# Altium PCB PCB_Minitek127-20pin.PcbDoc
Units mm, origin at the board's own origin, x right, y up, seen from the top; angles counter-clockwise.
Board outline 37 x 15.2 mm, 2 copper layers (Top Layer, Bottom Layer); 3 components, 18 nets, 44 pads, 35 vias.
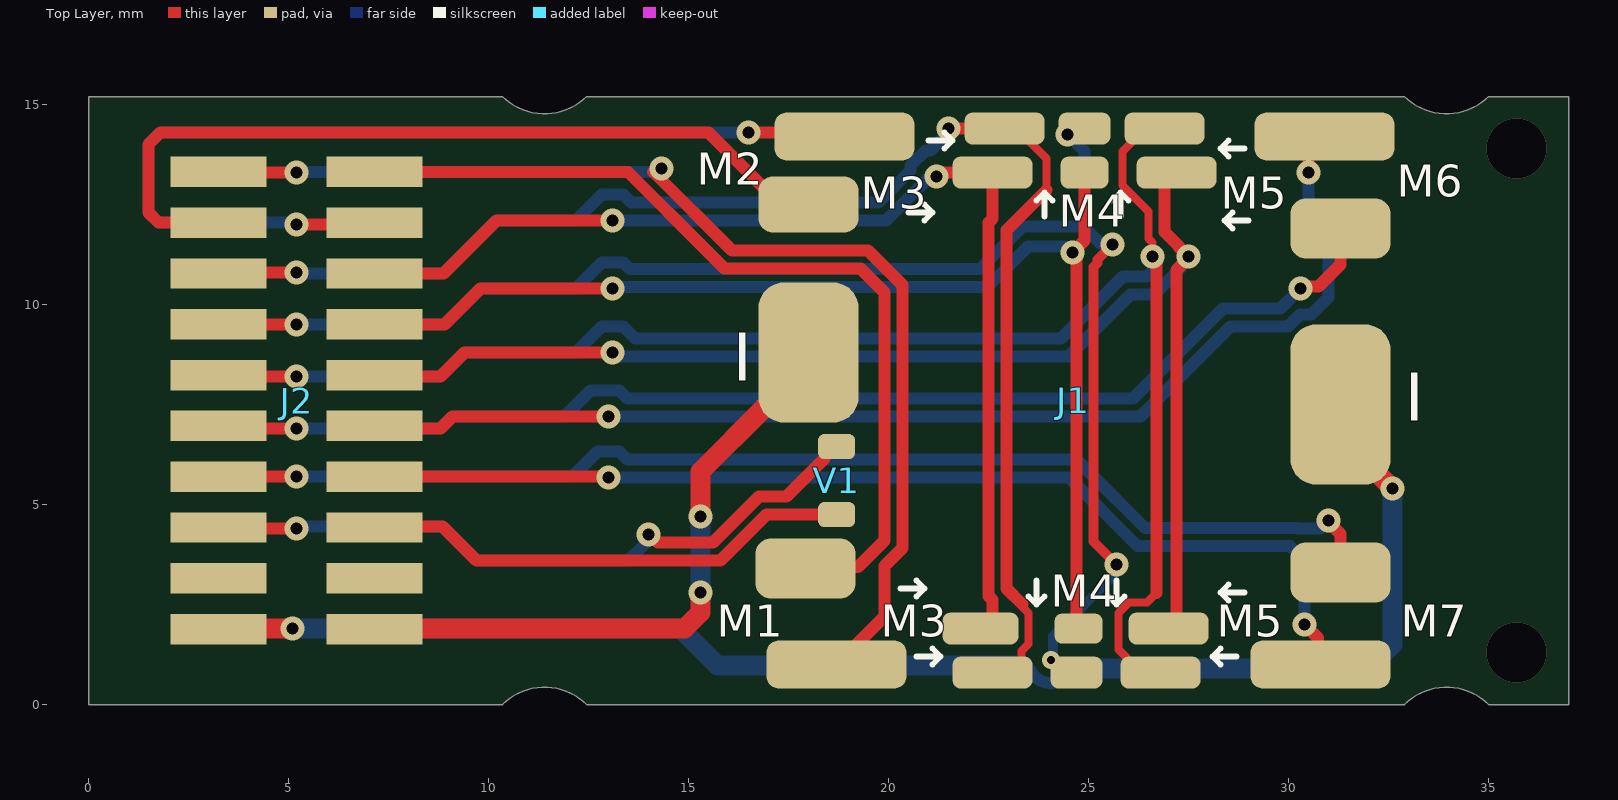
[diagram p0: Top Layer view]
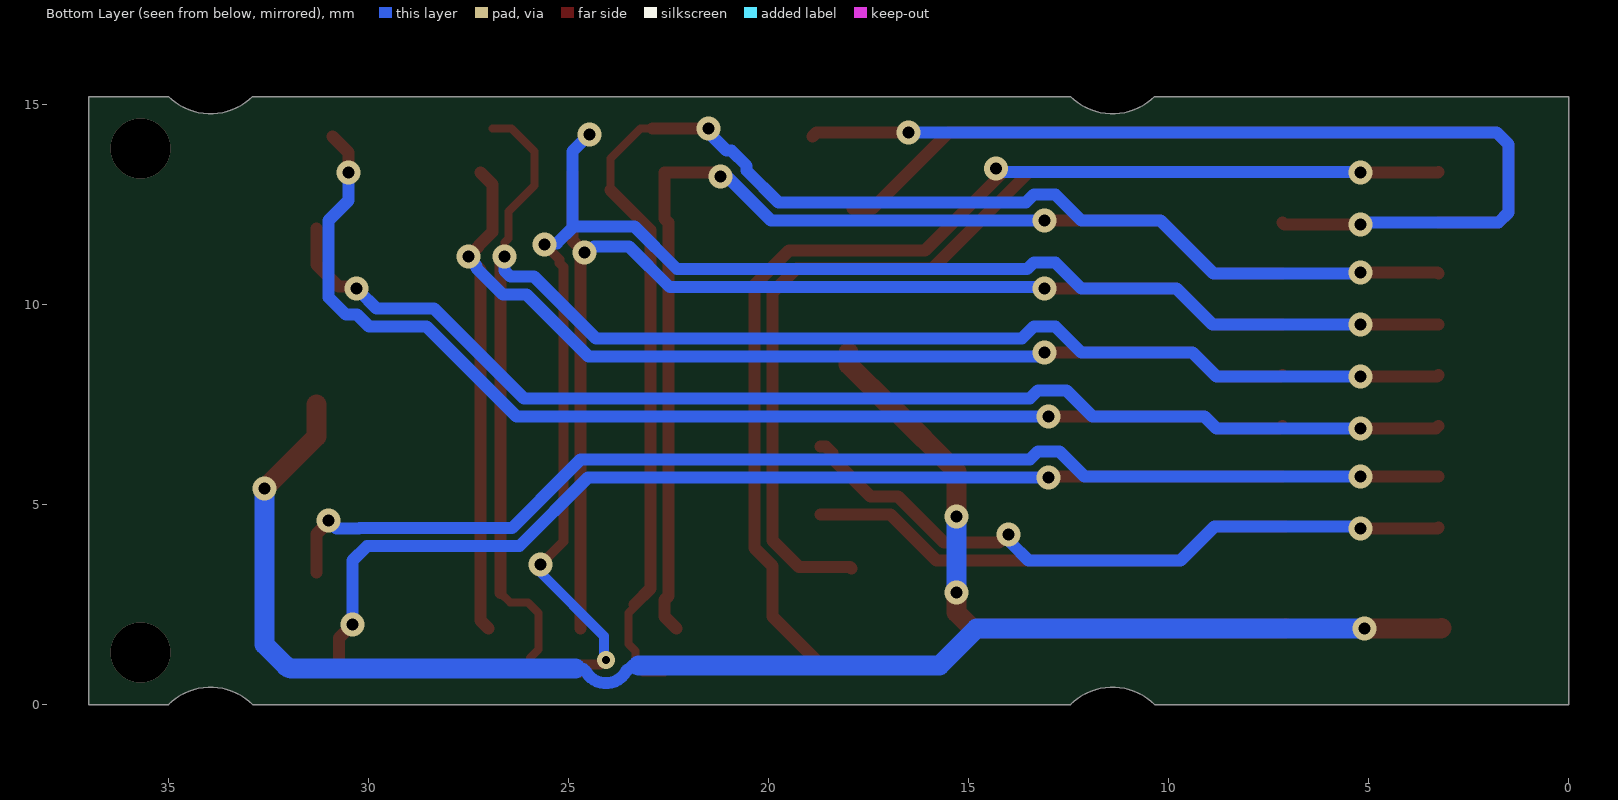
[diagram p1: Bottom Layer view, seen from below]

## Layer stack, top to bottom
Top Solder: solder mask 0.01, Solder Resist, Dk 3.5
Top Layer: signal copper 0.036
Dielectric 1: dielectric 0.32, FR-4, Dk 4.8
Bottom Layer: signal copper 0.036
Bottom Solder: solder mask 0.01, Solder Resist, Dk 3.5

## Board outline
0,0 0,15.2 10.35,15.2 ccw(c11.4,16.25) 12.45,15.2 32.9,15.2 ccw(c33.95,16.25) 35,15.2 37,15.2 37,0 35,0 ccw(c33.95,-1.05) 32.9,0 12.45,0 ccw(c11.4,-1.05) 10.35,0

## Design rules (kind name [scope] priority, off if disabled: settings)
Clearance [All] p1: gap=0.25 ignorepadtopadclearanceinfootprint=FALSE except(0: Arc-Hole Track-Hole SMDPad-Hole THPad-Hole Via-Hole Fill-Hole Poly-Hole Region-Hole Text-Hole; 0.15: Arc-Arc Arc-Track Arc-SMDPad Track-Track Track-SMDPad; 0.2: Arc-Via Track-Via SMDPad-SMDPad; 0.5: THPad-THPad)
HoleSize [All] p1: absolutevalues=TRUE maxlimit=6.3 minlimit=0.2 maxpercent=80.000 minpercent=20.000
MinimumAnnularRing [All] p1: minimumring=0.13
MinimumSolderMaskSliver [All] p1 off: minsoldermaskwidth=0.254
PolygonConnect [All] p1: connectstyle=Relief reliefconductorwidth=0.254 reliefentries=4 polygonreliefangle="90 Angle" airgapwidth=0.254
RoutingVias [All] p1: holewidth=0.3 width=0.6 viastyle="Through Hole" minholewidth=0.2 minwidth=0.45 maxholewidth=6.3 maxwidth=6.7
SilkToSilkClearance [All] p1: silktosilkclearance=0.15
SilkToSolderMaskClearance [IsPad] p1: minsilkscreentomaskgap=0.15 clearancetoexposedcopper=TRUE
SolderMaskExpansion [All] p1: expansion=0.102 istentingtop=FALSE useseparateexpansions=TRUE expansionbottom=0.102 istentingbottom=TRUE
Width [All] p1: maxlimit=0.5 minlimit=0.15 preferedwidth=0.3 minimp=50.000000 maximp=50.000000 favimp=50.000000
26 further rules are at their usual default settings.

## Classes and differential pairs
net class [1..16]: 1 2 3 4 5 6 7 8 9 10 11 12 13 14 15 16

## Components (designator, comment, footprint, x,y, rotation, side; value= is the part's Value field where it differs from the comment)
J1 "sample_contact_place" sample 24.6,7.6 r0 top
J2 "20021221-00020C4LF" 2002122100020C4LF 5.2,7.6 r90 top
V1 "Varicap" DIOC160X80X70L20N 18.7,5.6 r90 top

## Footprints (in the part's own frame and the unit in brackets; to place one, negate y for a bottom-side part, rotate by r counter-clockwise, add the part's x,y. Pads: shape width x height; smd on the part's side, far side on the other; paste and mask are expansions set on the pad)
2002122100020C4LF [mm]
  rect 0.76x2.4 smd: 1(5.715,1.95) 2(5.715,-1.95) 3(4.445,1.95) 4(4.445,-1.95) 5(3.175,1.95) 6(3.175,-1.95) 7(1.905,1.95) 8(1.905,-1.95) 9(0.635,1.95) 10(0.635,-1.95) 11(-0.635,1.95) 12(-0.635,-1.95) 13(-1.905,1.95) 14(-1.905,-1.95) 15(-3.175,1.95) 16(-3.175,-1.95) 17(-4.445,1.95) 18(-4.445,-1.95) 19(-5.715,1.95) 20(-5.715,-1.95)
  body extent -6.58,-3.07 6.58,3.07, height 4.85
DIOC160X80X70L20N [mm] "Diode, Chip; 1.60 mm L X 0.80 mm W X 0.70 mm H body"
  rrect51% 0.63x0.93 smd: A(0.85,0) C(-0.85,0)
  body extent -0.8,-0.4 0.8,0.4, height 0.7
sample [mm]
  rrect50% 3.5x1.2 smd: 1(-5.9,-6.6) 4(-5.7,6.6) 12(6.3,6.6) 14(6.2,-6.6)
  rrect50% 2.5x1.5 smd: 2(-6.675,-4.2) 11(6.7,4.3) 13(6.7,-4.3)
  rrect50% 2.5x1.4 smd: 3(-6.6,4.9)
  rrect50% 2x0.8 smd: 5(-2,-6.8) 5(-1.7,6.8) 6(-2,5.7) 9(2.2,-6.8) 9(2.3,6.8) 10(2.4,-5.7) 10(2.6,5.7)
  rrect50% 1.9x0.8 smd: 6(-2.3,-5.7)
  rrect50% 1.3x0.8 smd: 7(0.1,-6.8) 7(0.3,6.8)
  rrect50% 1.2x0.75 smd: 8(0.15,-5.7)
  rrect50% 1.2x0.8 smd: 8(0.3,5.7)
  rrect50% 2.5x3.5 smd: 15(-6.6,1.2)
  rrect50% 2.5x4 smd: 16(6.7,-0.1)
  silkscreen extent -4.3,-6.6 4.4,6.7, body extent -5,-5 5,5, height 1

## Part data
J2: "Connector", Manufacturer_Name=Amphenol, Datasheet Link=https://cdn.amphenol-icc.com/media/wysiwyg/files/drawing/20021221.pdf, Height=4.75mm, Manufacturer_Part_Number=20021221-00020C4LF

## Via types
v1: diameter 0.6, hole 0.3, Top Layer to Bottom Layer, tented bottom, 32 vias
v2: diameter 1.5, hole 1.5, Top Layer to Bottom Layer, tented bottom, 2 vias
v3: diameter 0.45, hole 0.2, Top Layer to Bottom Layer, tented bottom, 1 vias

## Nets (pads, with @x,y where several pads share a name; then routed paths per layer and width w, separated by ;. In a path a pad name is that pad's centre, name@x,y a point inside that pad or via, vN(x,y) a via of type N, cw(c..) or ccw(c..) an arc to the next point about the centre after c; other vN are vias at no path point)
1: J1.1 J2.1 | length 28.9
  Top Layer w0.3: J2.1 3.265,13.3 v1(5.2,13.3) ; v1(14.319,13.4) 14.2,13.4 14.118,13.318 16.086,11.35 19.486,11.35 20.35,10.486 20.35,3.914 19.9,3.464 19.9,2.2 J1.1
  Bottom Layer w0.3: v1(5.2,13.3) 5.215,13.315 14.234,13.315 v1(14.319,13.4)
2: J1.2 J2.2 | length 22.5
  Top Layer w0.3: J2.2 13.485,13.315 15.5,11.3 15.9,10.9 19.3,10.9 19.9,10.3 19.9,4.1 19.237,3.437 17.962,3.437 J1.2
3: J1.3 J2.3 | length 20.9
  Top Layer w0.3: J2.3 1.755,12.045 1.5,12.3 1.5,14.006 1.794,14.3 15.5,14.3 17.4,12.4 J1.3@17.9,12.4
4: J1.4 J2.4 | length 25.1
  Top Layer w0.3: v1(5.2,12) 7.105,12 J2.4 ; v1(16.5,14.3) 18.8,14.3 J1.4
  Bottom Layer w0.3: v1(5.2,12) 5.155,12.045 1.755,12.045 1.5,12.3 1.5,14.006 1.794,14.3 v1(16.5,14.3)
5: J1.5 J2.5 | length 37
  Top Layer w0.2: J1.5@22.6,0.8 23.134,0.8 23.296,0.962 ccw(c23.225,1.033) 23.325,1.033 23.325,1.339 23.5,1.514 23.5,2.286 23.325,2.461 23.325,2.468 ccw(c23.298,2.505) 23.345,2.505 ; J1.5@22.9,14.4 23.2,14.4 23.95,13.65 23.95,12.861
  Top Layer w0.3: J2.5 3.275,10.8 v1(5.2,10.8) ; v1(21.5,14.4) J1.5@22.9,14.4 ; 23.345,2.505 22.95,2.9 22.95,11.861 23.95,12.861
  Bottom Layer w0.3: v1(5.2,10.8) 5.225,10.775 8.875,10.775 10.2,12.1 12.181,12.1 12.631,12.55 12.831,12.75 13.369,12.75 13.569,12.55 19.75,12.55 20.548,13.348 20.548,13.469 20.928,13.85 21.05,13.85 21.4,14.2 21.4,14.3 v1(21.5,14.4)
6: J1.6 J2.6 | length 28.2
  Top Layer w0.3: J2.6 8.875,10.775 10.2,12.1 v1(13.1,12.1) ; v1(21.198,13.2) 21.298,13.3 22.6,13.3 22.6,12.147 22.5,12.047 22.5,2.714 22.6,2.614 22.6,2.2 J1.6@22.3,1.9
  Bottom Layer w0.3: v1(13.1,12.1) 19.936,12.1 21.036,13.2 21.1,13.136 21.164,13.2 v1(21.198,13.2)
7: J1.7 J2.7 | length 39.2
  Top Layer w0.25: J1.7@24.2,1 24.85,1 J1.7@24.95,0.9 ; J1.7@24.7,0.8 25.05,0.8 J1.7@24.95,0.9 ; J1.7@24.7,0.9 J1.7@24.95,0.9 ; v1(25.6,11.5) 25.225,11.125 25.225,11.041 25.125,10.941 25.125,4.074 v1(25.7,3.499)
  Top Layer w0.3: J2.7 3.255,9.5 v1(5.2,9.5)
  Bottom Layer w0.25: v3(24.066,1.108) 24.105,1.146 24.105,1.274 24.112,1.281 24.112,1.709 25.7,3.297 v1(25.7,3.499)
  Bottom Layer w0.3: v1(5.2,9.5) 8.9,9.5 9.8,10.4 12.181,10.4 12.831,11.05 13.369,11.05 13.537,10.882 22.282,10.882 23.35,11.95 24.869,11.95 25.291,11.528 25.572,11.528 v1(25.6,11.5) ; v1(24.478,14.252) 24.9,13.829 24.9,11.919
8: J1.8 J2.8 | length 29.9
  Top Layer w0.3: J2.8 7.155,9.5 8.9,9.5 9.8,10.4 v1(13.1,10.4) ; J1.8@24.7,1.9 24.7,11.119 24.6,11.219 v1(24.6,11.3) 24.9,11.6 J1.8@24.9,13.3
  Bottom Layer w0.3: v1(13.1,10.4) 13.132,10.432 22.468,10.432 23.486,11.45 24.369,11.45 24.519,11.3 v1(24.6,11.3)
9: J1.9 J2.9 | length 41.1
  Top Layer w0.2: v1(26.6,11.2) 26.6,11.554 26.5,11.654 26.5,12.322 25.85,12.972 25.85,13.828 26.422,14.4 J1.9@26.9,14.4 ; 26.7,2.791 26.459,2.55 26.014,2.55 25.75,2.286 25.75,1.95 25.75,1.372 25.962,1.16 25.962,1.092 26.254,0.8 J1.9@26.8,0.8
  Top Layer w0.3: J2.9 3.285,8.2 v1(5.2,8.2) ; v1(26.6,11.2) 26.7,11.1 26.7,2.791
  Bottom Layer w0.3: v1(5.2,8.2) 8.8,8.2 9.4,8.8 12.181,8.8 12.831,9.45 13.369,9.45 13.669,9.15 23.622,9.15 24.314,9.15 25.864,10.7 26.4,10.7 26.454,10.7 26.6,10.846 v1(26.6,11.2)
10: J1.10 J2.10 | length 33.7
  Top Layer w0.3: J2.10 7.185,8.2 8.8,8.2 9.4,8.8 v1(13.1,8.8) ; J1.10@27,1.9 27.2,2.1 27.2,10.862 v1@27.5,11.162 ; J1.10@27.2,13.3 26.9,13 26.9,11.819 27.25,11.469 27.25,11.45 v1(27.5,11.2)
  Bottom Layer w0.3: v1(13.1,8.8) 13.181,8.8 13.281,8.7 23.436,8.7 24.5,8.7 26.05,10.25 26.64,10.25 27.3,10.91 27.3,10.962 27.5,11.162 v1(27.5,11.2)
11: J1.11 J2.11 | length 30.8
  Top Layer w0.3: J2.11 3.315,6.9 v1(5.2,6.9) ; v1(30.3,10.4) 30.35,10.45 30.75,10.45 31.3,11 J1.11
  Bottom Layer w0.3: v1(5.2,6.9) 8.8,6.9 9.1,7.2 11.9,7.2 12.55,7.85 13.269,7.85 13.469,7.65 26.114,7.65 28.364,9.9 28.5,9.9 29.8,9.9 30.243,10.343 v1(30.3,10.4)
12: J1.12 J2.12 | length 29.8
  Top Layer w0.3: J2.12 7.215,6.9 8.8,6.9 9.1,7.2 v1(13,7.2) ; v1@30.361,13.3 v1(30.5,13.3) 30.5,13.8 J1.12
  Bottom Layer w0.3: v1(13,7.2) 26.3,7.2 28.55,9.45 29.986,9.45 30.286,9.75 30.569,9.75 30.619,9.8 31,10.181 31,12.1 30.5,12.6 v1(30.5,13.3)
13: J1.13 J2.13 | length 30.3
  Top Layer w0.3: J2.13 3.255,5.7 v1(5.2,5.7) ; v1(31,4.6) 31,4.564 31.3,4.264 J1.13
  Bottom Layer w0.3: v1(5.2,5.7) 12,5.7 12.1,5.7 12.725,6.325 13.269,6.325 13.469,6.125 24.7,6.125 25.025,5.8 26.414,4.411 30.225,4.411 30.236,4.4 30.8,4.4 v1(31,4.6)
14: J1.14 J2.14 | length 27
  Top Layer w0.3: J2.14 7.155,5.7 12.975,5.7 v1(13,5.675) ; v1@30.3,2 v1(30.4,2) 30.738,1.662 30.738,1.062 J1.14
  Bottom Layer w0.3: v1(13,5.675) 24.513,5.675 26.227,3.961 30.039,3.961 30.4,3.6 v1(30.4,2)
15: J1.15 J2.20 | length 16
  Top Layer w0.5: J2.20@7.075,1.91 7.085,1.9 14.9,1.9 15.3,2.3 v1(15.3,2.8) ; v1(15.3,4.7) 15.3,5.828 16.892,7.42 16.917,7.42 18,8.503 J1.15
  Bottom Layer w0.5: v1(15.3,2.8) v1(15.3,4.7)
16: J1.16 J2.19 | length 36.9
  Top Layer w0.5: J2.19@3.175,1.91 3.185,1.9 v1(5.1,1.9) ; J1.16 31.3,6.7 v1(32.6,5.4)
  Bottom Layer w0.3: 23.25,0.975 23.396,0.975 23.471,0.9 cw(c23.433,0.755) 23.564,0.828 ccw(c24.066,1.108) 24.566,0.824 cw(c24.697,0.75) 24.698,0.9 24.825,0.9
  Bottom Layer w0.5: v1(5.1,1.9) 14.8,1.9 15.725,0.975 23.25,0.975 ; 24.825,0.9 31.896,0.9 ccw(c31.896,1.15) 32.073,0.973 32.6,1.5 v1(32.6,5.4)
NetJ2_15: J2.15 V1.A | length 17.3
  Top Layer w0.3: J2.15 3.275,4.4 v1(5.2,4.4) ; v1(14,4.25) 14.038,4.25 14.238,4.05 15.614,4.05 16.764,5.2 17.45,5.2 18.401,6.151 18.401,6.286 18.565,6.45 V1.A
  Bottom Layer w0.3: v1(5.2,4.4) 5.25,4.45 8.85,4.45 9.7,3.6 13.5,3.6 13.943,4.043 13.943,4.193 v1(14,4.25)
NetJ2_16: J2.16 V1.C | length 12.5
  Top Layer w0.3: J2.16@7.075,4.45 8.85,4.45 9.7,3.6 15.8,3.6 16.95,4.75 V1.C
pads on no net: J2.17 J2.18
copper on no net:
  other v2: 35.7,1.3 35.7,13.9

## Silkscreen, mask and mechanical layers (free items; w line width, h text height)
Mechanical 1:
  lines w0.1: 10.35,0 0,0 0,15.2 0.1,15.2 10.35,15.2 ; 12.45,0 32.9,0 ; 12.45,15.2 32.9,15.2 ; 35,0 37,0 37,2 37,15.2 35,15.2
Mechnaical 2:
  lines w0.1: 10.35,0 cw(c11.4,-1.05) 12.45,0 10.35,0 ; 10.35,15.2 ccw(c11.4,16.25) 12.45,15.2 10.35,15.2 ; 32.9,0 cw(c33.95,-1.05) 35,0 32.9,0 ; 32.9,15.2 ccw(c33.95,16.25) 35,15.2 32.9,15.2

## Text inside footprints (layer, text, board x,y; h text height)
J1: Top Overlay "I" at 32.9,7.1 h1.2; Top Overlay "I" at 16.1,8.1 h1.2; Top Overlay "M5" at 28.3,12.4 h0.8; Top Overlay "M4" at 24.05,2.45 h0.8; Top Overlay "M3" at 19.8,1.7 h0.8; Top Overlay "M2" at 15.2,13 h0.8; Top Overlay "M1" at 15.7,1.7 h0.8; Top Overlay "M3" at 19.3,12.4 h0.8; Top Overlay "M4" at 24.25,11.95 h0.8; Top Overlay "M6" at 32.7,12.7 h0.8; Top Overlay "M7" at 32.8,1.7 h0.8; Top Overlay "M5" at 28.2,1.7 h0.8